# Altium PCB PCB_VitaLink.PcbDoc
Units mm, origin at the board's own origin, x right, y up, seen from the top; angles counter-clockwise.
Board outline 40 x 30 mm, 2 copper layers (Top Layer, Bottom Layer); 14 components, 17 nets, 53 pads, 8 vias.
Unrouted connection lines stored in the file: 1.
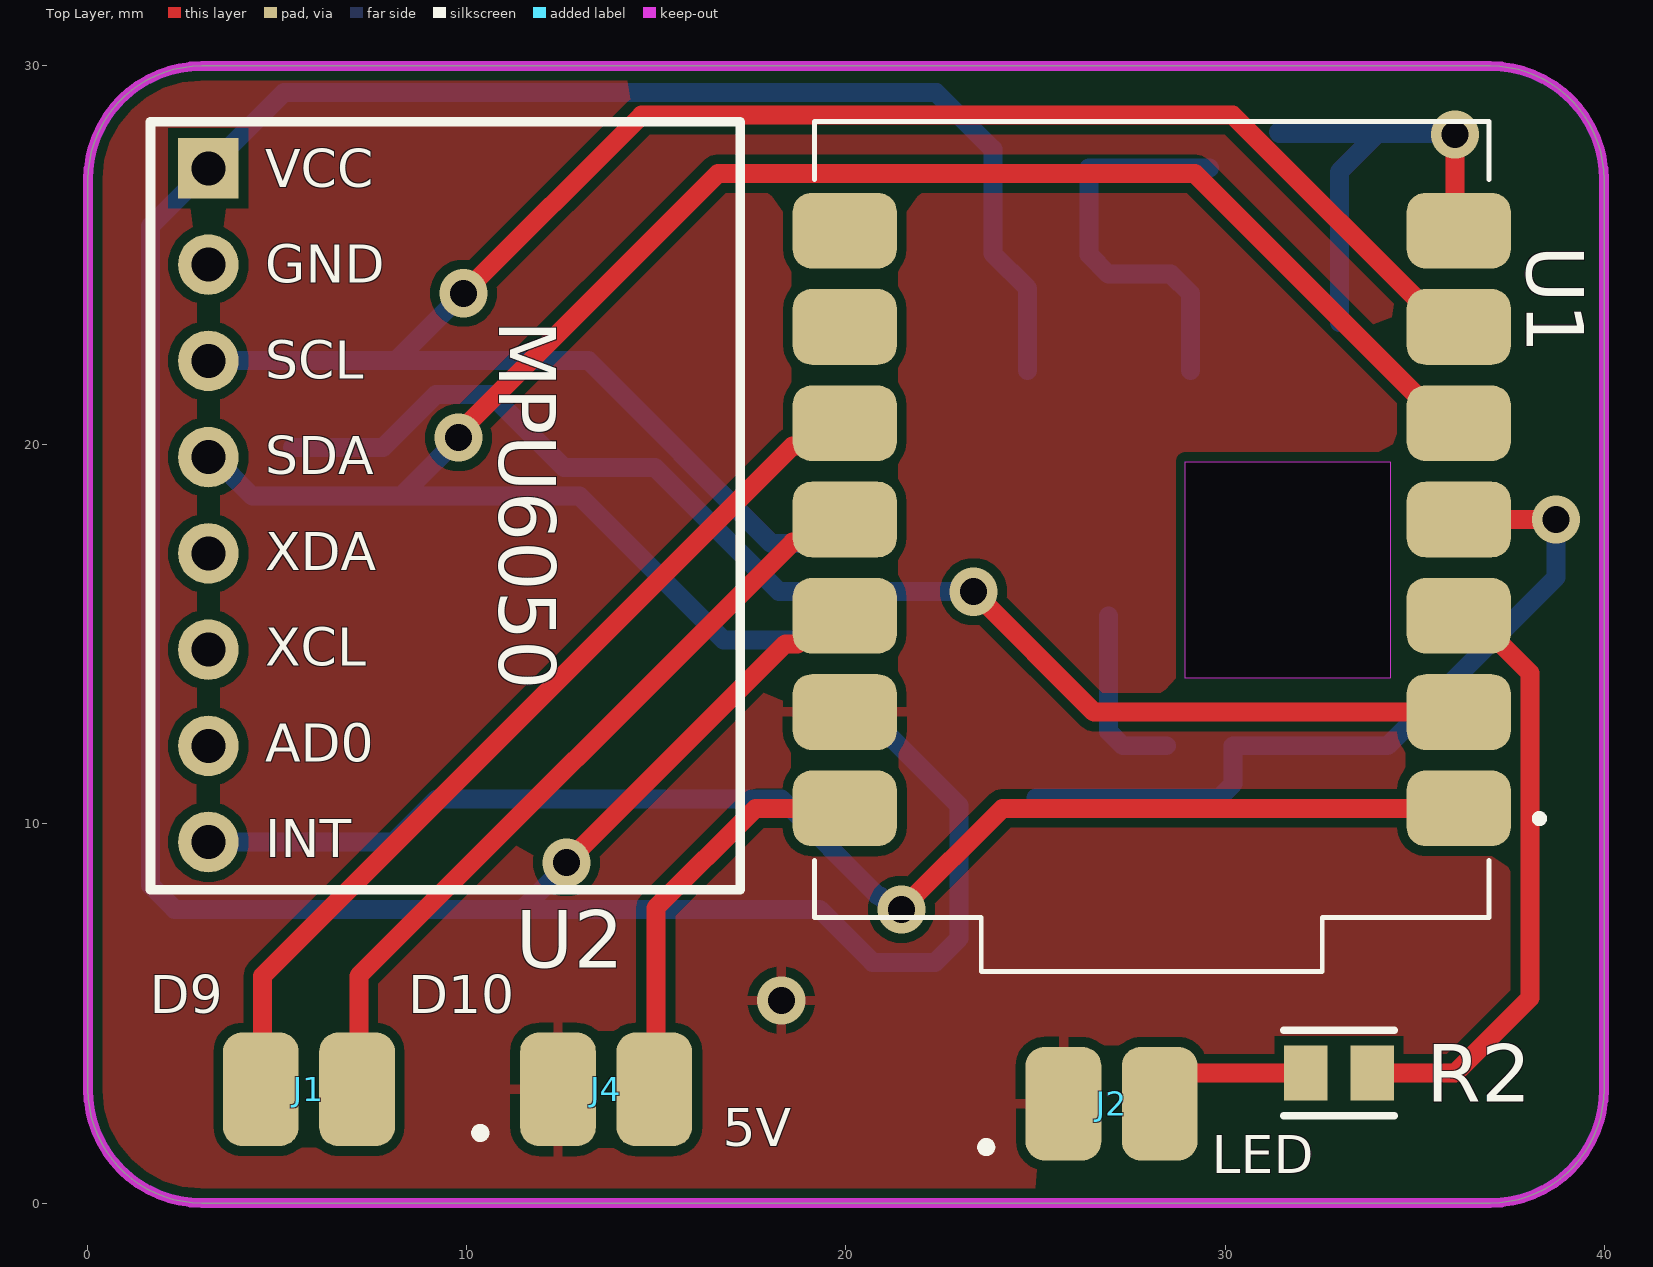
[diagram p0: Top Layer view]
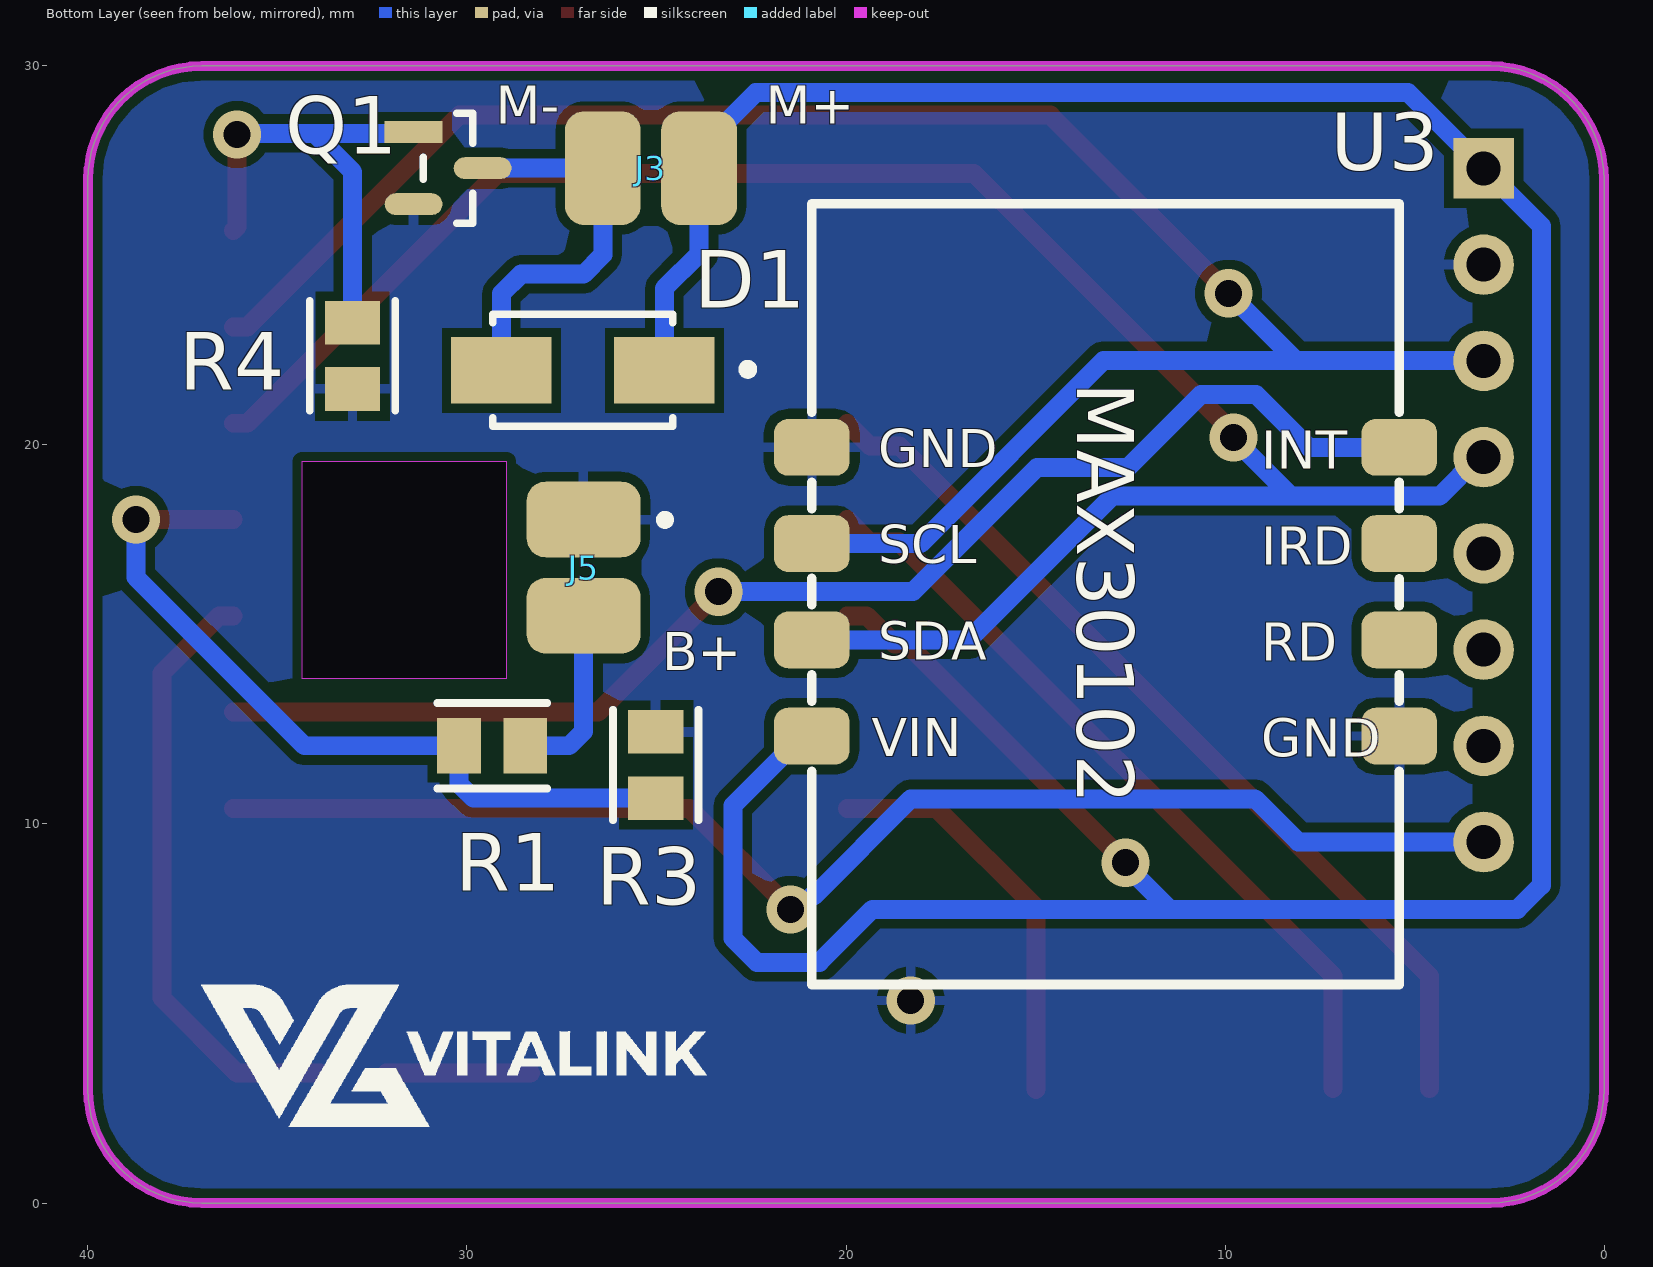
[diagram p1: Bottom Layer view, seen from below]
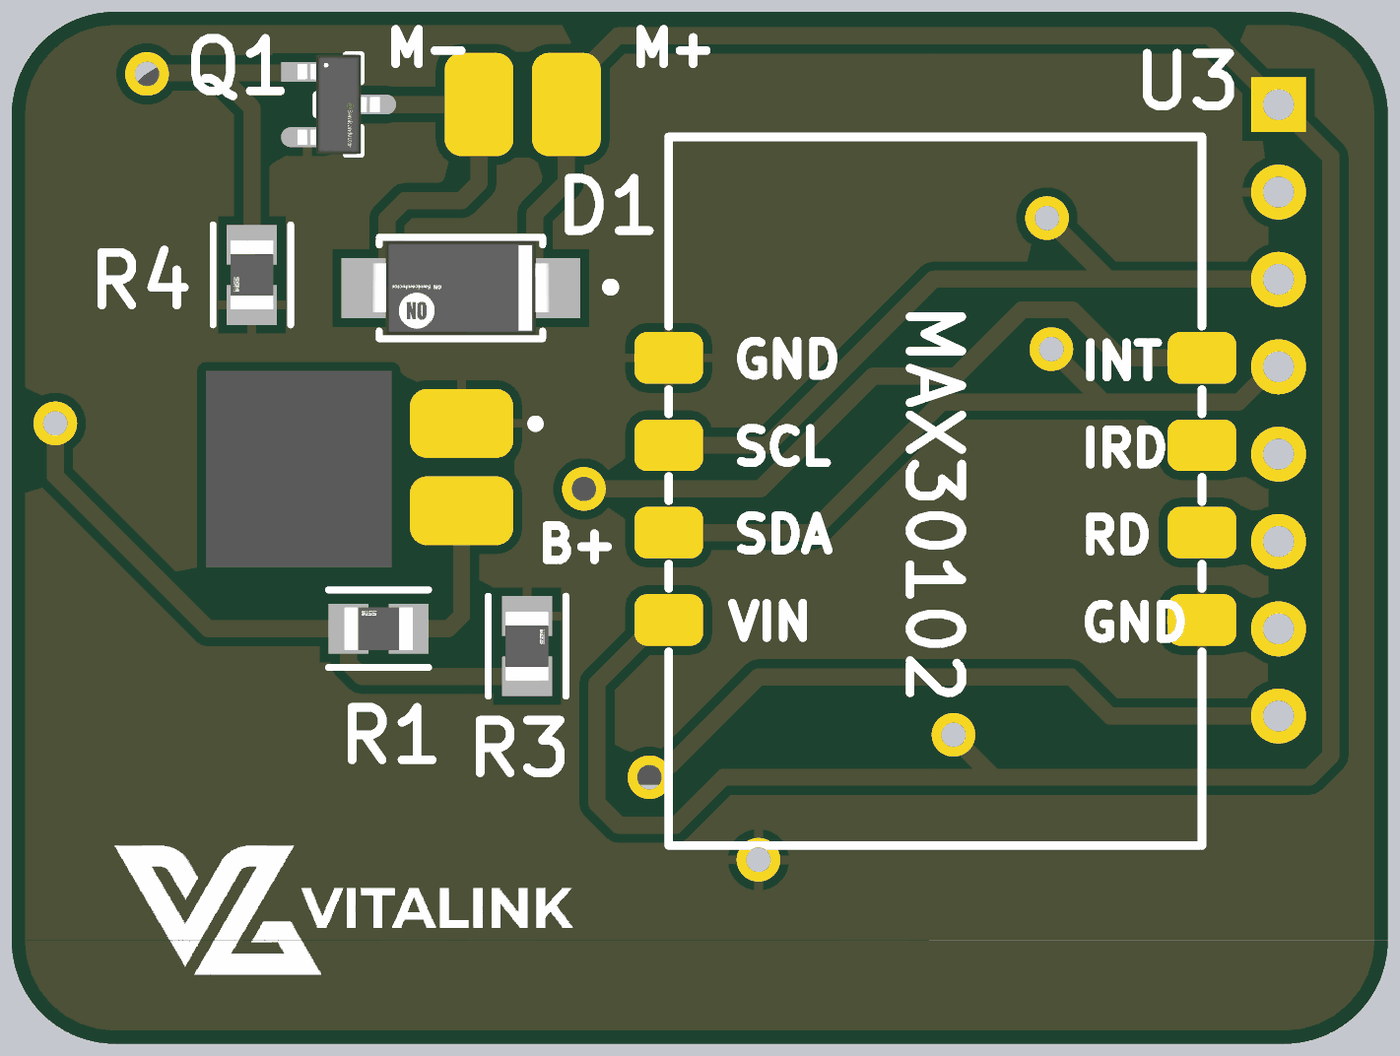
[diagram p2: 3D render of the assembled board from below, using the file's embedded part models]

## Layer stack, top to bottom
Top Solder: solder mask 0.0102, Solder Resist, Dk 3.5
Top Layer: signal copper 0.0356
Dielectric 1: dielectric 0.32, FR-4, Dk 4.8
Bottom Layer: signal copper 0.0356
Bottom Solder: solder mask 0.0102, Solder Resist, Dk 3.5

## Board outline
0,3 0,27 cw(c3,27) 3,30 37,30 cw(c37,27) 40,27 40,3 cw(c37,3) 37,0 3,0 cw(c3,3)
cut-out: 28.956,19.558 34.353,19.558 34.353,13.843 28.956,13.843

## Design rules (kind name [scope] priority, off if disabled: settings)
Clearance [All] p1: gap=0.254 ignorepadtopadclearanceinfootprint=FALSE
PolygonConnect [All] p1: connectstyle=Relief reliefconductorwidth=0.254 reliefentries=4 polygonreliefangle="90 Angle" airgapwidth=0.254
RoutingVias [All] p1: holewidth=0.711 width=1.27 viastyle="Through Hole" minholewidth=0.711 minwidth=1.27 maxholewidth=0.711 maxwidth=1.27
SolderMaskExpansion [All] p1: expansion=0 istentingtop=FALSE
SupplyNets "Schematic Supply Nets_2" [InNet('+5')] p1: voltage=0.000
SupplyNets "Schematic Supply Nets_1" [InNet('GND')] p2: voltage=0.000
SupplyNets "Schematic Supply Nets" [InNet('+3.3')] p3: voltage=0.000
UnRoutedNet [All] p1 off:
Width [All] p1: maxlimit=0.5 minlimit=0.5 preferedwidth=0.5
29 further rules are at their usual default settings.

## Components (designator, comment, footprint, x,y, rotation, side; value= is the part's Value field where it differs from the comment)
D1 "M7" FP-403AE-MFG 26.942,21.971 r0 bottom
J1 "Component_1" PCBComponent_1#1 7.1,3 r180 top
J2 "Component_1" PCBComponent_1#1 28.276,2.621 r180 top
J3 "Component_1" PCBComponent_1#1 26.416,27.305 r180 bottom
J4 "Component_1" PCBComponent_1#1 14.941,3 r180 top
J5 "Component_1" PCBComponent_1#1 26.924,15.494 r90 bottom
Q1 "AO3404" FP-318-08-IPC_B 30.499,27.305 r180 bottom
R1 "10K" FP-RG2012-IPC_B 29.337,12.065 r0 bottom
R2 "470" FP-RG2012-IPC_B 33.007,3.429 r0 top
R3 "10K" FP-RG2012-IPC_B 25.019,11.557 r90 bottom
R4 "10K" FP-RG2012-IPC_B 33.02,22.352 r270 bottom
U1 "102010428" MODULE_102010428 28.067,18.034 r180 top
U2 "MPU6050" PCBComponent_1#2 3.175,27.3 r180 top
U3 "MAX30102" PCBComponent_1#3 20.902,19.939 r270 bottom

## Footprints (in the part's own frame and the unit in brackets; to place one, negate y for a bottom-side part, rotate by r counter-clockwise, add the part's x,y. Pads: shape width x height; smd on the part's side, far side on the other; paste and mask are expansions set on the pad)
FP-318-08-IPC_B [mm]
  rect 1.524x0.578 smd paste+0 mask+0: 1(-0.91,0.95)
  rrect100% 1.524x0.578 smd paste+0 mask+0: 2(-0.91,-0.95) 3(0.91,0)
  silkscreen extent -0.65,-1.45 0.65,1.45, body extent -1.2,-1.45 1.2,1.45, height 1.11
FP-403AE-MFG [mm]
  rect 2.65x1.75 smd paste+0 mask+0: 1(-2.15,0) 2(2.15,0)
  silkscreen extent -4.47,-1.47 2.37,1.47, body extent -2.6,-1.36 2.6,1.36, height 2.41
FP-RG2012-IPC_B [mm]
  rect 1.155x1.456 smd paste+0 mask+0: 1(-0.876,0) 2(0.876,0)
  silkscreen extent -1.45,-1.13 1.45,1.13, body extent -1,-0.63 1,0.63, height 0.5
MODULE_102010428 [mm]
  rrect50% 2.75x2 smd: 1(-8.1,7.62) 2(-8.1,5.08) 3(-8.1,2.54) 4(-8.1,0) 5(-8.1,-2.54) 6(-8.1,-5.08) 7(-8.1,-7.62) 8(8.1,-7.62) 9(8.1,-5.08) 10(8.1,-2.54) 11(8.1,0) 12(8.1,2.54) 13(8.1,5.08) 14(8.1,7.62)
  silkscreen extent -10.33,-10.5 8.9,11.92, body extent -8.75,-10.5 8.75,11.5, height 4.41
PCBComponent_1#1 [mm]
  rrect50% 2x3 smd paste-2539.97: 1(0,0) 2(2.54,0)
PCBComponent_1#2 [mm]
  rect 1.6x1.6 hole 0.9 paste-2539.97: 1(0,0)
  round 1.6 hole 0.9 paste-2539.97: 2(0,2.54) 3(0,5.08) 4(0,7.62) 5(0,10.16) 6(0,12.7) 7(0,15.24) 8(0,17.775)
  silkscreen extent -14.03,-1.22 1.53,19.04
PCBComponent_1#3 [mm]
  rrect50% 1.5x2 smd paste-2539.97: 1(0,0) 2(2.54,0) 3(5.08,0) 4(7.62,0) 5(7.62,15.5) 6(5.08,15.5) 7(2.54,15.5) 8(0,15.5)
  silkscreen extent -6.42,0 14.17,15.5

## Part data
D1: library part CMP-00278-84324859-1, "ES1H Rectifier Diode, 1 Phase, 1 Element, 1A, 500V V(RRM), Silicon, DO-214AC", Average Rectified Current=1A, Capacitance=8pF, Case/Package=SMA, Forward Voltage=1.7V, Manufacturer Lifecycle Status="ACTIVE, NOT REC", Max Forward Surge Current (Ifsm)=30A, Max Junction Temperature (Tj)=150°C, Max Repetitive Reverse Voltage (Vrrm)=500V, Min Operating Temperature=-55°C, Peak Reverse Current=5µA, Contact Plating=Tin, Element Configuration=Single, Forward Current=1A, Height=2.235mm, Lead Free="Lead Free", Length=4.6mm, Lifecycle Status=NRND, Max Operating Temperature=150°C, Max Reverse Voltage (DC)=500V, Max Surge Current=30A, Mount="Surface Mount", NexarPartId=84324859, Number of Pins=2, Packaging="Cut Tape", Peak Non-Repetitive Surge Current=30A, Radiation Hardening=No, REACH SVHC="No SVHC", Recovery Time=35ns, Reverse Recovery Time=35ns, Reverse Voltage=500V, RoHS=Compliant, Schedule B="8541100080, 8541100080", Termination=SMD/SMT, Weight=106mg, Width=2.896mm
Q1: library part CMP-07173-000101-1, "MOSFET N-CH 50V 220MA SOT-23", Case/Package=SOT-23, Continuous Drain Current (ID)=220mA, Drain to Source Breakdown Voltage=50V, Drain to Source Resistance=3.5R, Gate to Source Voltage (Vgs)=20V, Input Capacitance=27pF, Max Operating Temperature=150°C, Max Power Dissipation=360mW, Min Operating Temperature=-55°C, On-State Resistance=6R, Package Quantity=1, Threshold Voltage=1.3V, Contact Plating=Tin, Current Rating=220mA, Drain to Source Voltage (Vdss)=50V, Dual Supply Voltage=50V, Element Configuration=Single, Fall Time=9ns, Height=0.93mm, Lead Free="Lead Free", Length=2.92mm, Mount="Surface Mount", Nominal Vgs=1.3V, Number of Elements=1, Number of Pins=3, Packaging="Tape and Reel", Power Dissipation=360mW, Radiation Hardening=No, Rds On Max=3.5R, REACH SVHC="No SVHC", Rise Time=9ns, Termination=SMD/SMT, Turn-Off Delay Time=20ns, Turn-On Delay Time=2.5ns, Voltage Rating (DC)=50V, Weight=0.03g, Width=1.3mm
R1 R2 R3 R4: library part CMP-28537-010674-1, "Automotive Metal Thin Film Chip Resistor, 0805, 470Ω, 0.1%, 25ppm/°C, 0.125W, 150V", Case Code (Imperial)=0805, Case Code (Metric)=2012, Max Operating Temperature=155°C, Max Power Dissipation=125mW, Min Operating Temperature=-55°C, Resistance=470R, Resistor Type="Thin Film", Temperature Coefficient=25ppm/°C, Tolerance=0.1%, Voltage Rating=150V, Case/Package=0805, Features="Automotive AEC-Q200", Height=0.4mm, Lead Free="Lead Free", Length=2mm, Number of Terminations=2, Packaging="Tape and Reel", Power Rating=125mW, RoHS Compliant=Yes, Series=RG, Termination=SMD/SMT, Voltage Rating (DC)=150V, Weight=0.000194oz, Width=1.2mm
U1: "RP2040 XIAO RP2040 series ARMÂ® CortexÂ®-M0+ MCU 32-Bit Embedded Evaluation Board", Package=None, Check_prices=https://www.snapeda.com/parts/102010428/Seeed+Technology+Co.%252C+Ltd/view-part/?ref=eda, MF="Seeed Technology Co., Ltd", MP=102010428, SnapEDA_Link=https://www.snapeda.com/parts/102010428/Seeed+Technology+Co.%252C+Ltd/view-part/?ref=snap
U2 U3: library part Component_1

## Via types
v1: diameter 1.27, hole 0.711, Top Layer to Bottom Layer, 8 vias

## Nets (pads, with @x,y where several pads share a name; then routed paths per layer and width w, separated by ;. In a path a pad name is that pad's centre, name@x,y a point inside that pad or via, vN(x,y) a via of type N, cw(c..) or ccw(c..) an arc to the next point about the centre after c; other vN are vias at no path point)
+3.3: D1.1 J3.2 U1.12 U2.1 U3.4 | length 88.5
  Top Layer w0.5: v1(12.624,8.979) 18.399,14.754 18.717,14.754 19.457,15.494 U1.12
  Bottom Layer w0.5: v1(12.624,8.979) 12.624,8.912 11.459,7.747 ; U3.4 21.152,12.319 22.987,10.484 22.987,6.985 22.352,6.35 20.701,6.35 19.304,7.747 11.459,7.747 ; D1.1 24.792,24.133 23.876,25.049 23.876,27.805 22.382,29.299 5.169,29.299 3.173,27.303 1.651,25.781 1.651,8.382 2.286,7.747 11.459,7.747
+5: J4.1 U1.14 | length 10.9
  Top Layer w0.5: J4.1@14.986,3 14.986,7.786 17.614,10.414 U1.14
BAT+: J5.1 R1.1 | length 4.7
  Bottom Layer w0.5: J5.1 26.924,12.446 27.305,12.065 R1.1
D0: U1.1 U2.8 | length 35.8
  Top Layer w0.5: v1(21.463,7.747) 24.13,10.414 U1.1
  Bottom Layer w0.5: U2.8@3.175,9.53 8.073,9.53 9.207,10.664 18.292,10.664 20.857,8.099 20.902,8.099 21.255,7.747 v1(21.463,7.747)
D1: U1.2 U3.8 | length 34.8
  Top Layer w0.5: v1(23.368,16.129) 26.543,12.954 U1.2
  Bottom Layer w0.5: U3.8 7.787,19.939 9.184,21.336 10.628,21.336 12.557,19.407 14.96,19.407 18.238,16.129 v1(23.368,16.129)
D2: R2.2 U1.3 | length 16.1
  Top Layer w0.5: R2.2 36.068,3.429 38.046,5.407 38.046,13.99 36.542,15.494 U1.3
D3: R1.2 R3.1 U1.4 | length 20.8
  Top Layer w0.5: U1.4 v1(38.735,18.034)
  Bottom Layer w0.5: R3.1 29.832,10.681 30.213,11.062 R1.2 34.29,12.065 38.735,16.51 v1(38.735,18.034)
D4: U1.5 U2.4 U3.3 | length 54
  Top Layer w0.5: v1(9.779,20.193) 9.779,20.32 16.617,27.158 29.208,27.158 35.792,20.574 U1.5
  Bottom Layer w0.5: U2.4@3.175,19.685 3.303,19.685 4.335,18.653 8.255,18.653 ; v1(9.779,20.193) 9.779,20.177 8.255,18.653 ; U3.3 16.764,14.859 12.97,18.653 8.255,18.653
D5: U1.6 U2.3 U3.2 | length 52.7
  Top Layer w0.5: v1(9.906,24.003) 14.605,28.702 30.204,28.702 35.792,23.114 U1.6
  Bottom Layer w0.5: U2.3@3.175,22.225 8.191,22.225 ; v1(9.906,24.003) 8.191,22.288 8.191,22.225 ; U3.2 18.034,17.399 13.208,22.225 8.191,22.225
D6: Q1.1 R4.1 U1.7 | length 12.7
  Top Layer w0.5: v1(36.068,28.194) 36.068,25.753 U1.7
  Bottom Layer w0.5: Q1.1 31.439,28.225 34.036,28.225 ; R4.1 33.02,27.209 34.036,28.225 ; v1(36.068,28.194) 36.037,28.225 34.036,28.225
D7: U1.8
D8: U1.9
D9: J1.2 U1.10 | length 24.4
  Top Layer w0.5: J1.2@4.605,3.025 4.605,5.994 18.589,19.978 19.371,19.978 U1.10
D10: J1.1 U1.11 | length 20.8
  Top Layer w0.5: J1.1@7.145,3.025 7.145,5.994 18.589,17.438 19.371,17.438 U1.11
GND: J2.2 J4.2 J5.2 Q1.2 R3.2 R4.2 U1.13 U2.2 U3.1 U3.5
  other v1: 18.293,5.347
NetD1_2: D1.2 J3.1 Q1.3 | length 10.6
  Bottom Layer w0.5: D1.2 29.092,23.994 28.575,24.511 26.924,24.511 26.416,25.019 J3.1 Q1.3
NetJ2_1: J2.1 R2.1 | length 3.8
  Top Layer w0.5: J2.1@28.321,3.432 28.324,3.429 R2.1
pads on no net: U2.5 U2.6 U2.7 U3.6 U3.7

## Polygon pours and split planes (outlines as drawn)
GND on Top Layer "GND_L01_P000" (solid, remove dead copper, pour order 0): -2.286,32.766 39.878,32.766 41.529,31.115 41.529,-4.064 1.143,-4.064 -2.286,-0.635
GND on Bottom Layer "GND_L02_P001" (solid, remove dead copper, pour order 1): -1.093,33.528 41.071,33.528 42.722,31.877 42.722,-3.302 2.336,-3.302 -1.093,0.127

## Keep-outs
Keep-Out Layer:
  the board outline again, w0.254

## Other copper
Top Layer:
  pour cut-out: 2.54,25.4 3.81,25.4 3.81,24.13 2.54,24.13

## Silkscreen, mask and mechanical layers (free items; w line width, h text height)
Top Overlay:
  circle w0.254: c23.7,1.475 r0.112
  circle w0.254: c10.35,1.85 r0.112
  text "D9" at 1.629,5.004 h1
  text "D10" at 8.454,5.004 h1
  text "5V" at 16.754,1.504 h1
  text "LED" at 29.654,0.779 h1
Bottom Overlay:
  drawing of 10 lines, arcs and shapes, not listed
  text "M+" at 22.121,28.479 h1
  text "M-" at 29.246,28.479 h1
  text "B+" at 24.846,14.054 h1

## Text inside footprints (layer, text, board x,y; h text height)
U2: Top Overlay "GND" at 4.679,24.278 h1; Top Overlay "AD0" at 4.679,11.647 h1; Top Overlay "XCL" at 4.679,14.174 h1; Top Overlay "XDA" at 4.679,16.7 h1; Top Overlay "SDA" at 4.679,19.226 h1; Top Overlay "SCL" at 4.679,21.752 h1; Top Overlay "VCC" at 4.679,26.804 h1; Top Overlay "INT" at 4.679,9.121 h1
U3: Bottom Overlay "GND" at 19.148,19.418 h1; Bottom Overlay "SCL" at 19.148,16.876 h1; Bottom Overlay "SDA" at 19.148,14.335 h1; Bottom Overlay "VIN" at 19.314,11.793 h1; Bottom Overlay "GND" at 9.048,11.768 h1; Bottom Overlay "RD" at 9.048,14.301 h1; Bottom Overlay "IRD" at 9.048,16.835 h1; Bottom Overlay "INT" at 9.048,19.368 h1